# EAGLE board base (EAGLE 7.3.0)
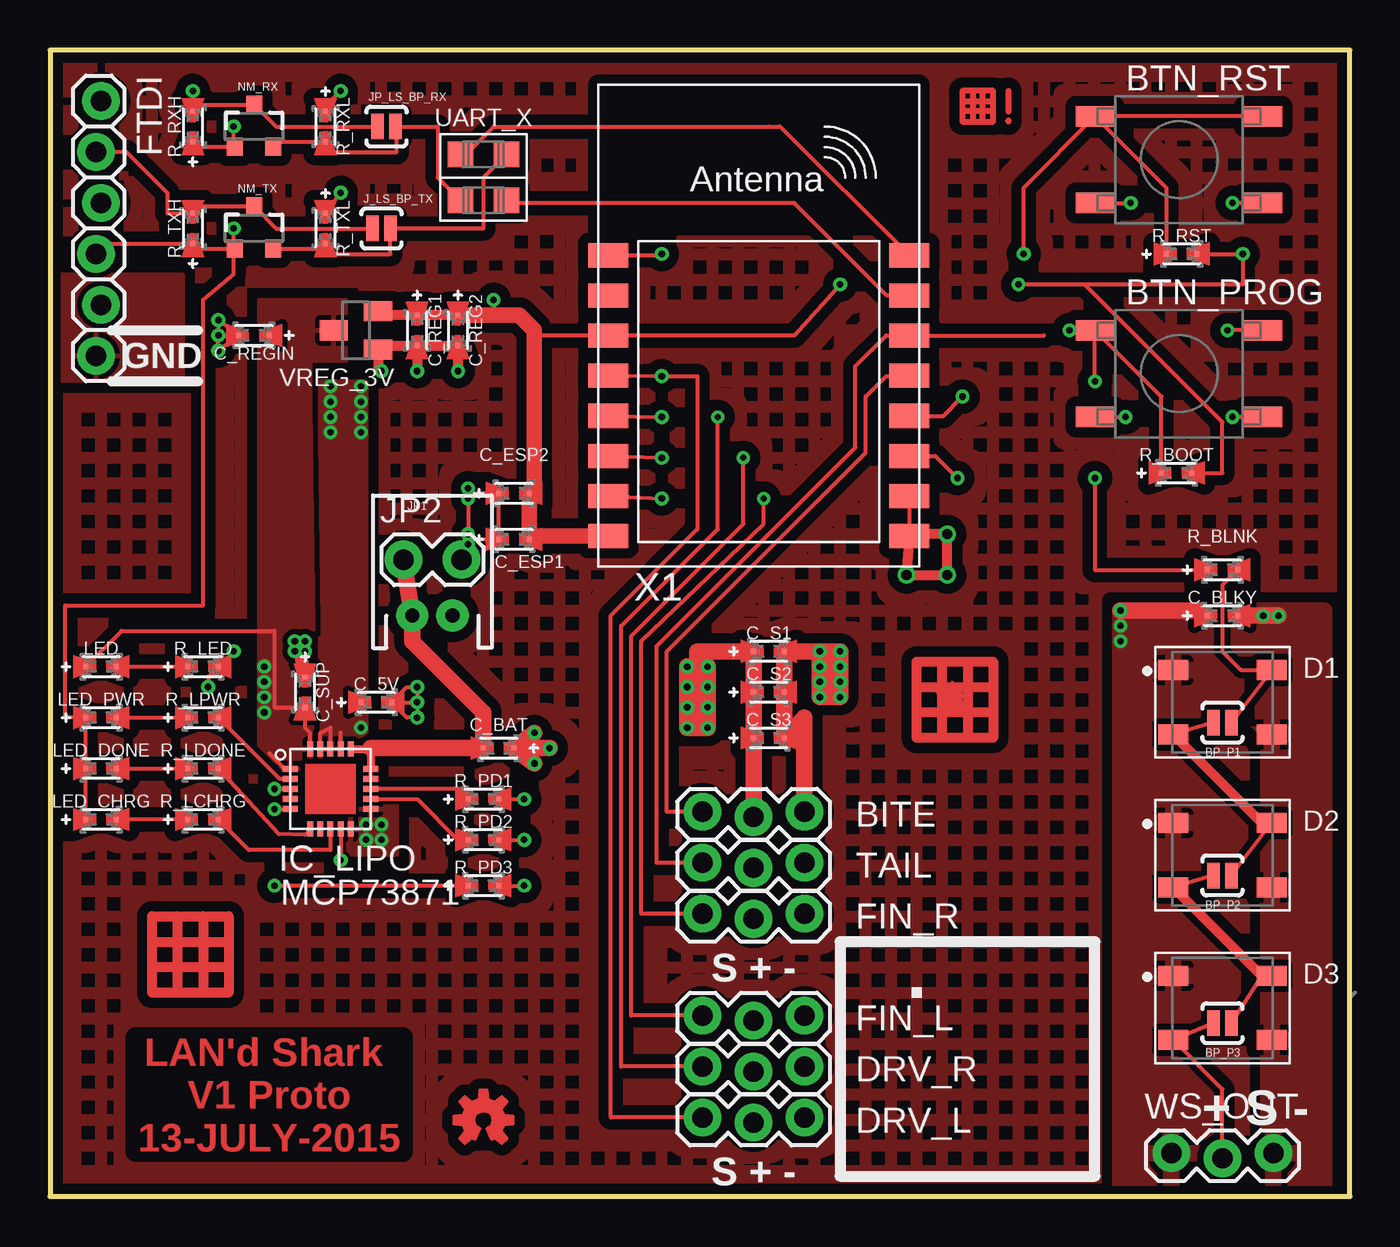
[diagram p0: board, top side]
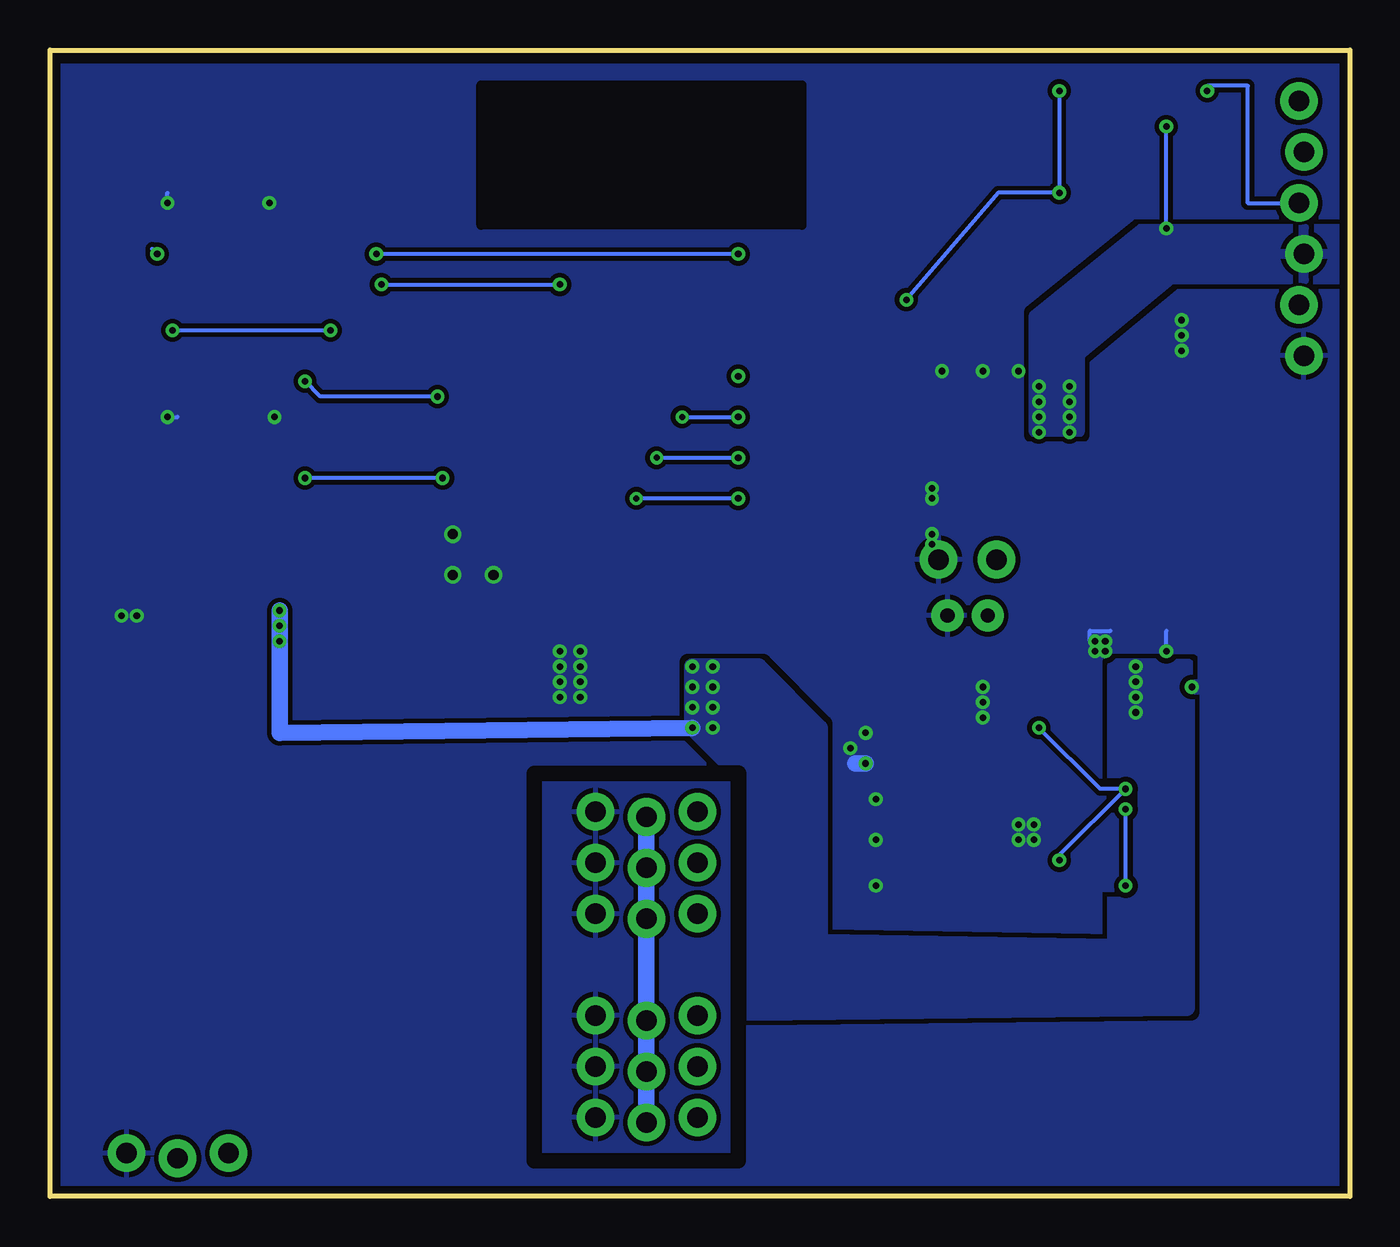
[diagram p1: board, bottom side, seen from below]

Size 64.77 x 57.15 mm. Coordinates in mm from the lower left corner, seen from the top.
Outline: 64.77,0 64.77,57.15 0,57.15 0,0 64.77,0
Copper layers (1*16): Top 0.0356mm / dielectric 1.5011mm / Bottom 0.0356mm
Design rules "LaenPCBOrder-tented": minimum track width 6mil, minimum drill 13mil, track to track 6mil, track to pad 6mil, pad to pad 6mil, via to via 6mil, smd to smd 0mil, copper to edge 15mil, drill to drill 6mil, minimum pad ring 7mil, minimum via ring 7mil, stop-mask expansion 4mil, vias tented up to drill 25mil, thermal gap 10mil
bRestrict: 4 lines

## Footprints (pad centres in the part's own frame; a part is rotated, then mirrored left to right if it is on the bottom)
1X03_LOCK = drill 1.016 pad 1.88: 1 0,0.127; 2 2.54,-0.127; 3 5.08,0.127
PAD-JUMPER-2-NO_YES_SILK = smd 0.635 x 1.27: 1 -0.45,0; 2 0.45,0
SMD_BUTTON = smd 1.905 x 1.016: P$1 -1.016,5.334; P$2 7.366,5.334; P$3 -1.016,1.016; P$4 7.366,1.016
0402-0603-0805-UNIVERSAL = smd 0.254 x 0.254: + -0.762,0; - 0.762,0
WS2812B = smd 1.5 x 1: 1 -2.45,1.6; 2 -2.45,-1.6; 3 2.45,-1.6; 4 2.45,1.6
1X06_LOCK = drill 1.016 pad 1.88: 1 0,0; 2 2.54,-0.254; 3 5.08,0; 4 7.62,-0.254; 5 10.16,0; 6 12.7,-0.254
QFN20 = smd 0.75 x 0.3: 1 -2,1; 2 -2,0.5; 3 -2,0; 4 -2,-0.5; 5 -2,-1; 11 2,-1; 12 2,-0.5; 13 2,0; 14 2,0.5; 15 2,1 | smd 0.3 x 0.75: 6 -1,-2; 7 -0.5,-2; 8 0,-2; 9 0.5,-2; 10 1,-2; 16 1,2; 17 0.5,2; 18 0,2; 19 -0.5,2; 20 -1,2
JST-2-PTH = drill 0.7 pad 1.6: 1 -1,0; 2 1,0
1X02_LOCK = drill 1.016 pad 1.88: 1 -0.178,0; 2 2.718,0
SOT23-3 = smd 0.8 x 0.9: 1 -0.95,-1; 2 0.95,-1; 3 0,1.1
UART_SWITCHER_0603 = smd 1.27 x 1.27: RX_A -1.143,-1.143; RX_B -1.143,1.143; TX_A 1.143,1.143; TX_B 1.143,-1.143
SOT23 = smd 1 x 1.4: 1 -0.95,-1.1; 2 0.95,-1.1; 3 0,1.1
ESP-12 = smd 2 x 1.2: 1 -7.5,4.5; 2 -7.5,2.5; 3 -7.5,0.5; 4 -7.5,-1.5; 5 -7.5,-3.5; 6 -7.5,-5.5; 7 -7.5,-7.5; 8 -7.5,-9.5; 9 7.5,-9.5; 10 7.5,-7.5; 11 7.5,-5.5; 12 7.5,-3.5; 13 7.5,-1.5; 14 7.5,0.5; 15 7.5,2.5; 16 7.5,4.5

## Placement (x,y rotation side)
BITE  [1X03_LOCK]  32.51,19.05 0 top
BP_P1  [PAD-JUMPER-2-NO_YES_SILK]  58.42,23.62 180 top
BP_P2  [PAD-JUMPER-2-NO_YES_SILK]  58.42,16 180 top
BP_P3  [PAD-JUMPER-2-NO_YES_SILK]  58.42,8.64 180 top
BTN_PROG  BUTTONSMD_BUTTON  [SMD_BUTTON]  53.09,37.85 0 top
BTN_RST  BUTTONSMD_BUTTON  [SMD_BUTTON]  53.09,48.51 0 top
C_5V  10uF  [0402-0603-0805-UNIVERSAL]  16.26,24.64 0 top
C_BAT  10uF  [0402-0603-0805-UNIVERSAL]  22.35,22.35 180 top
C_BLKY  0.1uF  [0402-0603-0805-UNIVERSAL]  58.42,28.96 0 top
C_ESP1  1uF  [0402-0603-0805-UNIVERSAL]  23.11,32.77 0 top
C_ESP2  0.1uF  [0402-0603-0805-UNIVERSAL]  23.11,35.05 0 top
C_REG1  10uF  [0402-0603-0805-UNIVERSAL]  18.29,43.18 270 top
C_REG2  1uF  [0402-0603-0805-UNIVERSAL]  20.32,43.18 270 top
C_REGIN  10uF  [0402-0603-0805-UNIVERSAL]  10.16,42.93 180 top
C_S1  220uF  [0402-0603-0805-UNIVERSAL]  35.81,27.18 0 top
C_S2  10uF  [0402-0603-0805-UNIVERSAL]  35.81,25.15 0 top
C_S3  .1uF  [0402-0603-0805-UNIVERSAL]  35.81,22.86 0 top
C_SUP  10uF  [0402-0603-0805-UNIVERSAL]  12.7,25.15 270 top
D1  [WS2812B]  58.42,24.64 0 top
D2  [WS2812B]  58.42,17.02 0 top
D3  [WS2812B]  58.42,9.4 0 top
DRV_L  [1X03_LOCK]  32.51,3.81 0 top
DRV_R  [1X03_LOCK]  32.51,6.35 0 top
FIN_L  [1X03_LOCK]  32.51,8.89 0 top
FIN_R  [1X03_LOCK]  32.51,13.97 0 top
FTDI  [1X06_LOCK]  2.54,54.61 270 top
IC_LIPO  MCP73871  [QFN20]  13.97,20.32 0 top
J_LS_BP_TX  [PAD-JUMPER-2-NO_YES_SILK]  16.51,48.26 0 top
JP1  [JST-2-PTH]  19.05,28.96 0 top
JP2  [1X02_LOCK]  17.78,31.75 0 top
JP_LS_BP_RX  [PAD-JUMPER-2-NO_YES_SILK]  16.76,53.34 0 top
LED  [0402-0603-0805-UNIVERSAL]  2.54,26.42 0 top
LED_CHRG  [0402-0603-0805-UNIVERSAL]  2.54,18.8 0 top
LED_DONE  [0402-0603-0805-UNIVERSAL]  2.54,21.34 0 top
LED_PWR  [0402-0603-0805-UNIVERSAL]  2.54,23.88 0 top
LOGO1  OSHW-LOGOS  [OSHW-LOGO-S]  21.59,3.81 0 top
NM_RX  MOSFET-NCHANNELSMD  [SOT23-3]  10.16,53.34 0 top
NM_TX  MOSFET-NCHANNELSMD  [SOT23-3]  10.16,48.26 0 top
R_BLNK  50  [0402-0603-0805-UNIVERSAL]  58.42,31.24 0 top
R_BOOT  [0402-0603-0805-UNIVERSAL]  56.13,36.07 0 top
R_LCHRG  [0402-0603-0805-UNIVERSAL]  7.62,18.8 0 top
R_LDONE  [0402-0603-0805-UNIVERSAL]  7.62,21.34 0 top
R_LED  [0402-0603-0805-UNIVERSAL]  7.62,26.42 0 top
R_LPWR  [0402-0603-0805-UNIVERSAL]  7.62,23.88 0 top
R_PD1  2k  [0402-0603-0805-UNIVERSAL]  21.59,19.81 0 top
R_PD2  100k  [0402-0603-0805-UNIVERSAL]  21.59,17.78 0 top
R_PD3  150k  [0402-0603-0805-UNIVERSAL]  21.59,15.49 0 top
R_RST  [0402-0603-0805-UNIVERSAL]  56.39,46.99 0 top
R_RXH  [0402-0603-0805-UNIVERSAL]  7.11,53.34 90 top
R_RXL  [0402-0603-0805-UNIVERSAL]  13.72,53.34 270 top
R_TXH  [0402-0603-0805-UNIVERSAL]  7.11,48.26 90 top
R_TXL  [0402-0603-0805-UNIVERSAL]  13.72,48.26 270 top
TAIL  [1X03_LOCK]  32.51,16.51 0 top
UART_X  UART_SWITCHER0603  [UART_SWITCHER_0603]  21.59,50.8 0 top
VREG_3V  MC1700T-3v0  [SOT23]  15.24,43.18 90 top
WS_OUT  [1X03_LOCK]  55.88,2.03 0 top
X1  [ESP-12]  35.31,42.42 0 top

## Library data of the parts
BITE DRV_L DRV_R FIN_L FIN_R FTDI JP2 TAIL WS_OUT = SparkFun-Connectors
BP_P1-BP_P3 J_LS_BP_TX JP_LS_BP_RX = SparkFun-Passives
BTN_PROG BTN_RST C_5V C_BAT C_BLKY C_ESP1 C_ESP2 C_REG1 C_REG2 C_REGIN C_S1-C_S3 C_SUP D1-D3 LED LED_CHRG LED_DONE LED_PWR LOGO1 NM_RX NM_TX R_BLNK R_BOOT R_LCHRG R_LDONE R_LED R_LPWR R_PD1-R_PD3 R_RST R_RXH R_RXL R_TXH R_TXL UART_X VREG_3V = tekdemo
IC_LIPO X1 = adafruit
JP1 = SparkFun-Connectors; PROD_ID: CONN-09863; SKU: PRT-09914

## Nets
3.0V: C_ESP1.- C_ESP2.- C_REG1.+ C_REG2.+ R_BOOT.- R_RST.- R_RXL.+ R_TXL.+ VREG_3V.2 X1.3 X1.8
4: TAIL.1 X1.14
5: BITE.1 X1.13
5V: C_5V.+ FTDI.4 IC_LIPO.3 IC_LIPO.4 IC_LIPO.9 IC_LIPO.17 IC_LIPO.18 IC_LIPO.19 LED_CHRG.+ LED_DONE.+ LED_PWR.+ NM_RX.1 NM_TX.1 R_RXH.+ R_TXH.+
12: FIN_L.1 X1.6
13: FIN_R.1 X1.7
14: DRV_R.1 X1.5
16: DRV_L.1 X1.4
BLINKY: R_BLNK.+ X1.11
BOOTLOADER: BTN_PROG.P$1 BTN_PROG.P$2 R_BOOT.+ X1.12
DTR: FTDI.1
ESP_RX_I: UART_X.TX_B X1.15
ESP_TX_O: UART_X.RX_B X1.16
FTDI_RX_I: JP_LS_BP_RX.2 NM_RX.2 R_RXL.- UART_X.RX_A
FTDI_RX_I_HV: FTDI.3 JP_LS_BP_RX.1 NM_RX.3 R_RXH.-
FTDI_TX_0: J_LS_BP_TX.2 NM_TX.2 R_TXL.- UART_X.TX_A
FTDI_TX_0_HV: FTDI.2 J_LS_BP_TX.1 NM_TX.3 R_TXH.-
GND: BITE.3 BTN_PROG.P$3 BTN_PROG.P$4 BTN_RST.P$3 BTN_RST.P$4 C_5V.- C_BAT.+ C_BLKY.- C_ESP1.+ C_ESP2.+ C_REG1.- C_REG2.- C_REGIN.- C_S1.- C_S2.- C_S3.- C_SUP.+ D1.3 D2.3 D3.3 DRV_L.3 DRV_R.3 FIN_L.3 FIN_R.3 FTDI.6 IC_LIPO.10 IC_LIPO.11 JP1.2 JP2.2 R_LED.- R_PD1.- R_PD2.- R_PD3.- TAIL.3 VREG_3V.1 WS_OUT.3 X1.9 X1.10
N$1: IC_LIPO.8 R_LCHRG.-
N$3: BP_P1.2 BP_P2.1 D1.2 D2.4
N$4: IC_LIPO.5 R_PD3.+
N$5: LED_CHRG.- R_LCHRG.+
N$6: LED.- R_LED.+
N$7: LED_DONE.- R_LDONE.+
N$8: LED_PWR.- R_LPWR.+
N$9: IC_LIPO.2 R_LPWR.-
N$10: BP_P1.1 D1.4 R_BLNK.-
N$11: BP_P2.2 BP_P3.1 D2.2 D3.4
N$12: BP_P3.2 D3.2 WS_OUT.2
N$20: IC_LIPO.7
N$21: IC_LIPO.6 R_LDONE.-
N$22: IC_LIPO.12 R_PD2.+
N$23: IC_LIPO.13 R_PD1.+
RESET: BTN_RST.P$1 BTN_RST.P$2 R_RST.+ X1.1
VBAT: C_BAT.- IC_LIPO.14 IC_LIPO.15 IC_LIPO.16 JP1.1 JP2.1
VSUPPLY: BITE.2 C_BLKY.+ C_REGIN.+ C_S1.+ C_S2.+ C_S3.+ C_SUP.- D1.1 D2.1 D3.1 DRV_L.2 DRV_R.2 FIN_L.2 FIN_R.2 IC_LIPO.1 IC_LIPO.20 LED.+ TAIL.2 VREG_3V.3 WS_OUT.1

## Tracks (layer width: path | path; a pad name or v marks a point on that pad's centre or on a via)
3.0V  (via drill 0.33)
  Top 0.203: R_RXL.+ 13.72,54.36 v14.48,55.12 | R_TXL.+ v14.48,50.04 | v22.1,44.7 22.1,43.94 | 24.13,42.93 X1.3 37.08,42.92 v39.37,45.47 | R_BOOT.- 58.42,36.07 58.42,38.61 51.56,45.47 | R_RST.- v59.44,46.99 59.44,45.47 51.56,45.47 | 51.56,45.47 v48.26,45.47 | C_ESP2.- 24.13,35.31
  Top 0.508: C_REG2.+ C_REG1.+ 16.78,43.94 VREG_3V.2 | 24.03,32.92 C_ESP1.-
  Top 0.762: C_REG2.+ 22.1,43.94 23.37,43.94 24.13,43.18 24.13,42.93 24.13,35.31 | X1.8 24.03,32.92 | C_ESP2.- C_ESP1.-
  Bottom 0.203: v14.48,55.12 v14.48,50.04 17.53,50.04 v22.1,44.7 | v59.44,46.99 59.69,47.24 | v48.26,45.47 v39.37,45.47
4
  Top 0.203: 49.53,42.93 X1.14 42.8,42.93 41.66,42.93 40.13,41.4 40.13,37.34 30.23,27.43 30.23,16.64 TAIL.1
5
  Top 0.203: BITE.1 30.73,19.18 30.73,27.18 40.64,37.08 40.64,39.88 41.66,40.89 42.78,40.89 X1.13
5V  (via drill 0.33)
  Top 0.203: 13.46,22.35 13.46,23.11 13.97,23.37 IC_LIPO.18 IC_LIPO.19 | LED_CHRG.+ LED_DONE.+ LED_PWR.+ 0.76,23.88 0.76,29.46 7.62,29.46 7.62,44.7 9.14,45.97 9.14,47.26 | FTDI.4 3.05,47.5 R_TXH.+ 7.35,47.26 NM_TX.1 9.14,47.26 | R_RXH.+ 7.6,52.34 NM_RX.1 9.14,52.41 v9.14,53.34 | 9.14,47.26 v9.14,48.26 | IC_LIPO.17 14.47,23.11 14.48,23.11 | IC_LIPO.4 IC_LIPO.3 v11.18,20.32 | v15.49,23.37 15.49,23.62 | IC_LIPO.9 v14.48,16.76
  Bottom 0.203: v9.14,48.26 v9.14,53.34 | v15.49,23.37 12.45,20.32 v11.18,20.32 14.48,17.02 v14.48,16.76
  other vias: 13.97,38.1 13.97,38.86 15.49,38.1 15.49,39.62 13.97,39.62 13.97,40.39 15.49,40.39 15.49,38.86
  pour Top (isolate 0.254, rank 2): 13.46,21.84 13.46,40.64 15.75,40.64 15.75,23.11
  pour Bottom: -1.27,48.26 -1.27,45.72 8.89,45.72 13.46,41.91 13.46,38.1 15.75,38.1 15.75,43.94 10.41,48.26
12  (via drill 0.3, 0.33)
  Top 0.203: X1.6 v30.48,36.83 | FIN_L.1 28.96,9.02 28.96,27.94 34.54,33.53 v34.54,36.83
  Bottom 0.203: v34.54,36.83 v30.48,36.83
13  (via drill 0.3, 0.33)
  Top 0.203: X1.7 v30.48,34.8 | FIN_R.1 29.46,14.1 29.46,27.69 35.56,33.53 v35.56,34.8
  Bottom 0.203: v30.48,34.8 v35.56,34.8
14  (via drill 0.3, 0.33)
  Top 0.203: X1.5 v30.48,38.86 | DRV_R.1 28.45,6.48 28.45,28.45 33.27,33.27 v33.27,38.86
  Bottom 0.203: v33.27,38.86 v30.48,38.86
16  (via drill 0.33)
  Top 0.203: X1.4 v30.48,40.89 32.26,40.89 32.26,33.27 27.94,28.96 27.94,3.94 DRV_L.1
BLINKY  (via drill 0.33)
  Top 0.203: X1.11 44.11,36.92 v45.21,35.81 | v52.07,35.81 52.07,31.24 R_BLNK.+
  Bottom 0.203: v45.21,35.81 v52.07,35.81
BOOTLOADER  (via drill 0.33)
  Top 0.203: X1.12 44.51,38.92 v45.47,39.88 | v52.07,40.64 BTN_PROG.P$1 | R_BOOT.+ 55.37,39.88 BTN_PROG.P$1 | BTN_PROG.P$2 v58.67,43.18 | v50.8,43.18 BTN_PROG.P$1
  Bottom 0.203: v45.47,39.88 51.31,39.88 v52.07,40.64 | v58.67,43.18 v50.8,43.18
ESP_RX_I
  Top 0.203: 42.85,44.96 X1.15 41.7,44.92 37.08,49.53 22.86,49.53 UART_X.TX_B
ESP_TX_O
  Top 0.203: UART_X.RX_B 20.7,51.94 22.1,53.34 35.81,53.34 36.32,53.34 36.38,53.34 X1.16
FTDI_RX_I
  Top 0.203: NM_RX.2 11.11,52.58 R_RXL.- 13.72,52.07 17.27,52.07 17.27,53.34 JP_LS_BP_RX.2 19.3,53.34 19.3,50.8 UART_X.RX_A
FTDI_RX_I_HV  (via drill 0.33)
  Top 0.203: JP_LS_BP_RX.1 11.26,53.34 NM_RX.3 7.45,54.44 R_RXH.- v7.11,55.12
  Bottom 0.203: v7.11,55.12 7.11,55.37 5.08,55.37 5.08,49.53 FTDI.3
FTDI_TX_0
  Top 0.203: NM_TX.2 13.72,47.26 R_TXL.- 14.22,46.99 16.96,46.99 J_LS_BP_TX.2 21.59,48.26 21.59,50.8 UART_X.TX_A
FTDI_TX_0_HV
  Top 0.203: J_LS_BP_TX.1 11.26,48.26 NM_TX.3 7.45,49.36 R_TXH.- 5.84,49.02 5.84,50.04 3.81,52.07 FTDI.2
GND  (via drill 0.33, 0.51)
  Top 0.203: C_5V.- 17.78,25.4 v18.29,25.4 v18.29,24.64 | v18.29,24.64 v18.29,23.88 17.78,23.88 C_5V.- | C_5V.- v18.29,24.64 | R_PD3.- v23.62,15.49 | R_PD2.- v23.62,17.78 | R_PD1.- v23.62,19.81 | v7.87,25.4 7.87,25.91 R_LED.- v9.14,27.18 | X1.10 X1.9 | BTN_PROG.P$4 v58.93,38.86 | BTN_RST.P$4 v58.93,49.53 | BTN_RST.P$3 v53.85,49.53 | BTN_PROG.P$3 v53.59,38.86 | v20.83,35.31 20.83,35.05 C_ESP2.+ C_ESP1.+ 20.83,32.77 v20.83,32.51 | v20.83,34.8 v20.83,33.02 | v12.19,27.18 v12.19,27.69 | 12.45,27.18 v12.7,27.18 | C_REGIN.- v8.38,43.69 v8.38,42.93 | v8.38,42.93 v8.38,42.16 C_REGIN.- | v8.38,42.93 C_REGIN.- | 60.27,23.04 D1.3
  Top 0.508: FTDI.6 2.79,42.42 | v20.32,41.15 C_REG2.- C_REG1.- | C_REG1.- v18.29,41.15 | v16.51,41.15 16.34,41.32 VREG_3V.1 17.04,42.42 C_REG1.- | 42.81,30.99 v44.7,30.99 v44.7,33.02 42.67,33.02 | X1.9 v42.67,30.99
  Top 0.635: C_SUP.+ 12.45,27.18
  Top 0.813: BITE.3 37.59,23.88 C_S3.- C_S2.- C_S1.- v38.35,27.18 | 38.86,27.18 v38.35,27.18 | v38.35,27.18 v38.35,26.42 v38.35,25.65 v38.35,24.89 38.86,24.89 | 38.86,24.89 v39.37,24.89 v39.37,25.65 v39.37,26.42 v39.37,27.18 38.86,27.18 | 38.86,27.18 38.86,24.89 | C_BAT.+ v24.13,23.11 | C_BAT.+ v24.89,22.35 | C_BAT.+ v24.13,21.59 | v61.21,28.96 C_BLKY.-
  Bottom 0.203: v58.93,38.86 58.42,38.86 | v58.93,49.53 58.93,50.04 | v53.85,49.53 53.85,49.78 | v53.59,38.86 53.59,39.12 | v20.83,35.31 v20.83,34.8 | v20.83,33.02 v20.83,32.51 | v12.7,27.18 v12.19,27.18 | v12.19,27.69 v12.7,27.69 12.95,27.69 12.95,28.19 11.94,28.19 | v9.14,27.18 9.14,28.19
  Bottom 0.813: v24.13,21.59 24.64,21.59
  other vias: 15.75,18.54 15.75,17.78 16.51,18.54 16.51,17.78 60.45,28.96
  pour Bottom (isolate 0.229, rank 6): 0.51,56.39 0.51,-0.25 65.02,-0.25 65.02,56.39
  pour Top: 14.73,17.02 14.73,19.56 17.27,19.56 17.27,17.02
  pour Top (isolate 0.254, rank 3): -1.27,40.64 -1.27,45.97 6.6,45.97 6.6,40.64
  pour Top (isolate 0.305, rank 3): 60.71,0.51 63.5,0.51 63.5,29.21 59.18,29.21 57.66,26.16 60.71,23.11
N$1
  Top 0.203: IC_LIPO.8 13.97,17.27 9.91,17.27 R_LCHRG.-
N$3
  Top 0.203: BP_P1.2 D1.2 | BP_P2.1 D2.4
  Top 0.508: D1.2 60.39,18.62 D2.4
N$4  (via drill 0.33)
  Top 0.203: R_PD3.+ v11.18,15.49 | v11.18,19.3 11.68,19.32 IC_LIPO.5
  Bottom 0.203: v11.18,15.49 v11.18,19.3
N$5
  Top 0.203: R_LCHRG.+ LED_CHRG.-
N$6
  Top 0.203: LED.- R_LED.+
N$7
  Top 0.203: LED_DONE.- R_LDONE.+
N$8
  Top 0.203: LED_PWR.- R_LPWR.+
N$9
  Top 0.203: IC_LIPO.2 11.44,20.82 R_LPWR.-
N$10
  Top 0.203: R_BLNK.- 58.42,30.48 58.42,27.18 59.35,26.25 D1.4 BP_P1.1
N$11
  Top 0.203: 60.39,11 BP_P3.1 | BP_P2.2 D2.2
  Top 0.508: D2.2 60.39,11 D3.4
N$12
  Top 0.203: BP_P3.2 D3.2 58.42,5.35 WS_OUT.2
N$15
  pour Top (isolate 0.508, rank 6, hatched): 0,0 0,57.15 64.77,57.15 64.77,0
N$17
  Top 0.508: 6.35,13.97 5.08,13.97 5.08,12.7 | 6.35,13.97 7.62,13.97 | 7.62,13.97 8.89,13.97 8.89,12.7 | 8.89,12.7 8.89,11.43 | 8.89,11.43 8.89,10.16 7.62,10.16 | 7.62,10.16 6.35,10.16 | 6.35,10.16 5.08,10.16 5.08,11.43 | 5.08,11.43 5.08,12.7 | 5.08,12.7 8.89,12.7 | 8.89,11.43 5.08,11.43 | 6.35,10.16 6.35,13.97 | 7.62,13.97 7.62,10.16
N$19
  Top 0.305: 45.47,54.61 45.47,55.12 45.97,55.12 | 45.47,54.61 45.47,54.1 | 45.47,54.1 45.47,53.59 45.97,53.59 | 45.97,53.59 46.48,53.59 | 46.48,53.59 46.99,53.59 46.99,54.1 | 46.99,54.1 46.99,54.61 | 46.99,54.61 46.99,55.12 46.48,55.12 | 46.48,55.12 45.97,55.12 | 45.97,55.12 45.97,53.59 | 46.48,53.59 46.48,55.12 | 45.47,54.61 46.99,54.61 | 46.99,54.1 45.47,54.1
N$21
  Top 0.203: IC_LIPO.6 12.97,18.3 12.7,18.03 11.4,18.07 R_LDONE.-
N$22
  Top 0.203: IC_LIPO.12 18.29,19.81 20.32,17.78 R_PD2.+
N$23
  Top 0.203: R_PD1.+ 20.83,20.32 IC_LIPO.13
N$24
  Top 0.305: 47.75,55.12 47.75,54.1
N$25
  Top 0.305: 47.75,53.59 47.75,53.64
RESET  (via drill 0.33)
  Top 0.203: X1.1 30.41,46.92 v30.48,46.99 | v48.51,46.99 48.51,50.29 BTN_RST.P$1 | BTN_RST.P$1 55.63,50.29 R_RST.+ | BTN_RST.P$2 BTN_RST.P$1
  Bottom 0.203: v30.48,46.99 v48.51,46.99
VBAT
  Top 0.203: 15.97,22.32 15.97,22.35 | IC_LIPO.14 IC_LIPO.15
  Top 0.406: IC_LIPO.15 15.97,22.32 IC_LIPO.16
  Top 0.813: JP2.1 JP1.1 18.05,27.67 21.59,24.13 C_BAT.- 15.97,22.35
VSUPPLY  (via drill 0.33)
  Top 0.203: IC_LIPO.1 11.7,21.32 10.92,22.1 | LED.+ 3.56,28.19 11.18,28.19 11.18,24.38 C_SUP.- 12.7,23.37 12.95,23.11 12.95,22.35 | C_BLKY.+ 57.4,28.7 57.49,28.54
  Top 0.406: 57.4,29.21 57.4,28.7
  Top 0.813: BITE.2 C_S3.+ C_S2.+ C_S1.+ 32.26,27.18 32.26,26.42 | 32.26,23.37 v32.77,23.37 v32.77,24.38 v32.77,25.4 v32.77,26.42 32.26,26.42 | 32.26,26.42 v31.75,26.42 v31.75,25.4 v31.75,24.38 v31.75,23.37 32.26,23.37 | 32.26,23.37 32.26,26.42 | v53.34,29.21 57.4,29.21
  Bottom 0.813: DRV_L.2 DRV_R.2 FIN_L.2 FIN_R.2 TAIL.2 BITE.2 | v32.77,23.37 53.34,23.11 v53.34,29.21
  other vias: 53.34,28.45 53.34,27.69 10.67,25.65 10.67,26.42 10.67,24.89 10.67,24.13
  pour Top (isolate 0.254): 10.41,21.08 10.41,44.7 14.73,44.7 14.73,41.66 12.95,41.66 12.95,39.37 13.21,21.08
  pour Bottom (isolate 0.254): 32.77,23.37 29.97,20.57 29.97,9.14 8.13,9.4 8.13,26.42 11.68,26.42 11.68,12.45 26.42,12.7 26.42,23.37 29.46,26.42 32.77,26.42
  pour Top (isolate 0.305, rank 4): 53.34,29.21 53.34,0.51 58.42,0.51 59.94,29.21
WAFFLE
  Top 0.127: 44.2,25.15 44.96,24.13 45.72,24.64 44.96,25.65 44.7,25.15 45.21,25.15
  Top 0.508: 44.45,26.67 43.18,26.67 43.18,25.4 | 44.45,26.67 45.72,26.67 | 45.72,26.67 46.99,26.67 46.99,25.4 | 46.99,25.4 46.99,24.13 | 46.99,24.13 46.99,22.86 45.72,22.86 | 45.72,22.86 44.45,22.86 | 44.45,22.86 43.18,22.86 43.18,24.13 | 43.18,24.13 43.18,25.4 | 43.18,25.4 46.99,25.4 | 46.99,24.13 44.96,24.13 43.18,24.13 | 44.45,22.86 44.45,26.67 | 45.72,26.67 45.72,24.64 45.72,22.86
(copper drawn outside any net)
  shapes: Top area x1

## Text on the board
Top: LAN'd Shark / V1 Proto / 13-JULY-2015
tPlace: GND | S + - | + S - | S + -
tStop: LAN'd Shark / V1 Proto / 13-JULY-2015